# EAGLE board sensorNodev2 (EAGLE 7.2.0)
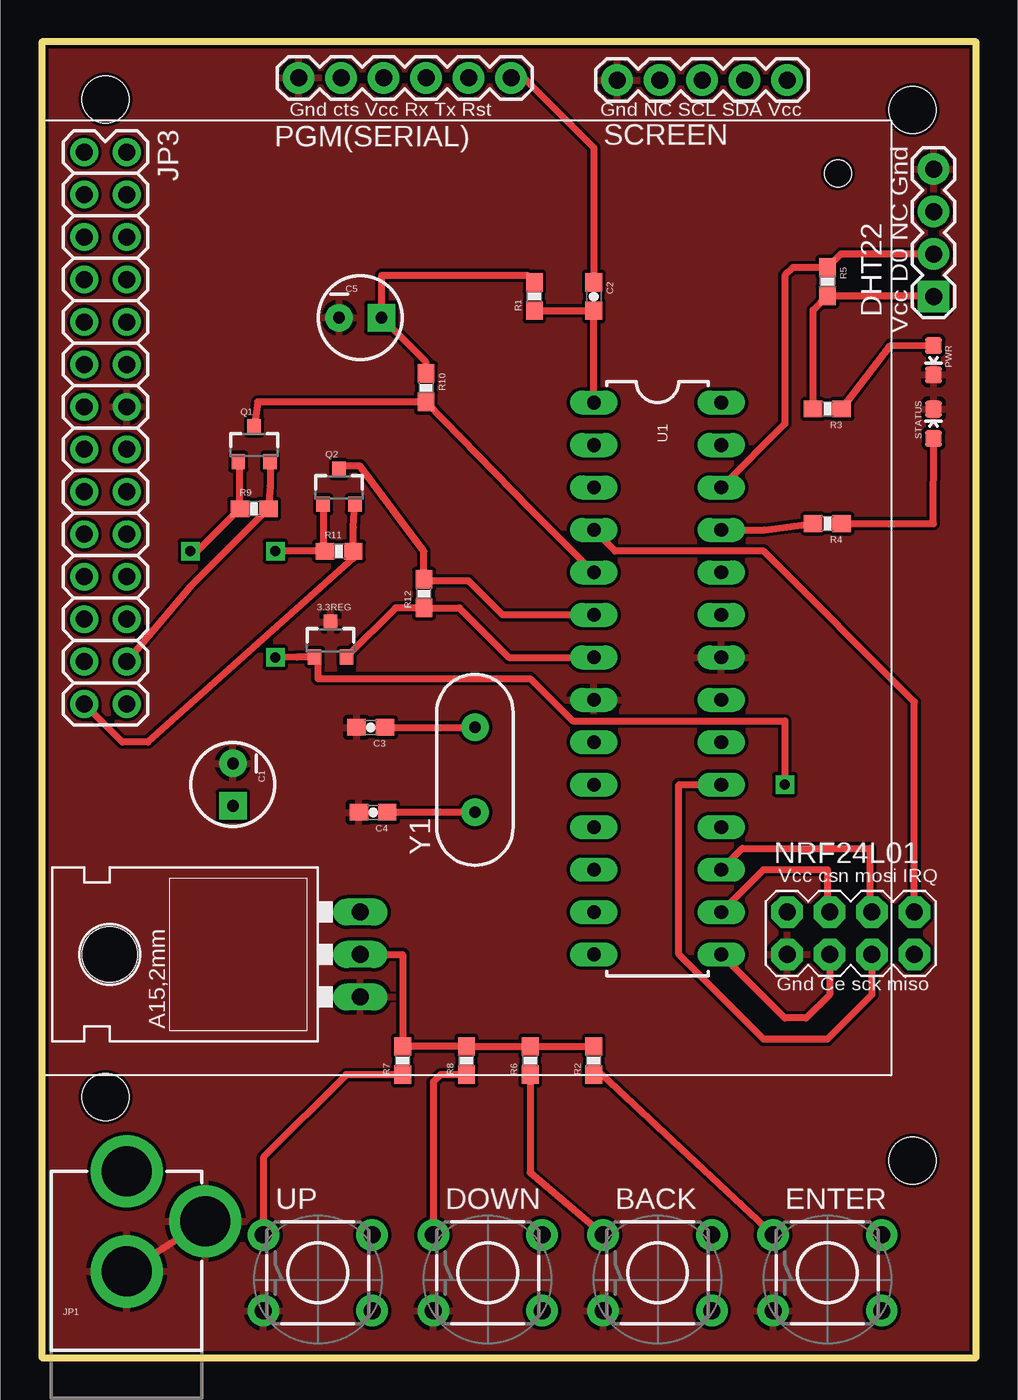
[diagram p0: board, top side]
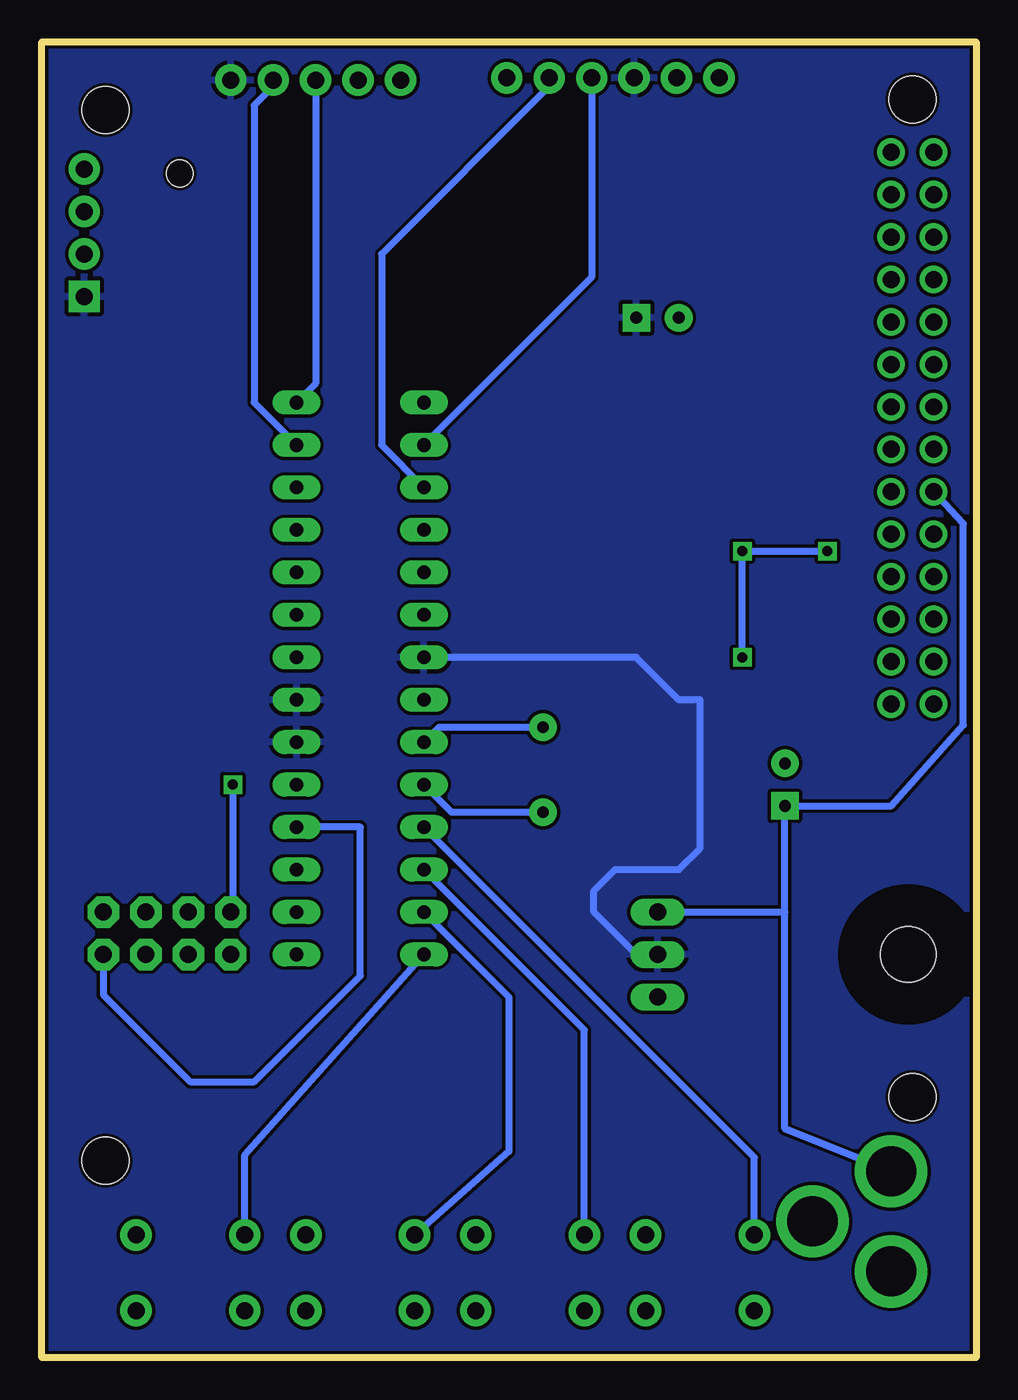
[diagram p1: board, bottom side, seen from below]

Size 55.88 x 78.74 mm. Coordinates in mm from the lower left corner, seen from the top.
Outline: 0,78.74 0,0 55.88,0 55.88,78.74 0,78.74
Copper layers (1*16): Top 0.035mm / dielectric 1.5mm / Bottom 0.035mm
Design rules "SparkFun": minimum track width 8mil, minimum drill 20mil, track to track 8mil, track to pad 8mil, pad to pad 8mil, via to via 8mil, smd to smd 8mil, copper to edge 8mil, drill to drill 8mil, minimum pad ring 12mil, minimum via ring 10mil, stop-mask expansion 4mil, vias tented up to drill 20mil, thermal gap 10mil

## Footprints (pad centres in the part's own frame; a part is rotated, then mirrored left to right if it is on the bottom)
SOT23-3 = smd 0.8 x 0.9: 1 -0.95,-1; 2 0.95,-1; 3 0,1.1
TACTILE-PTH = drill 1.016 pad 1.88: 1 -3.251,2.261; 2 3.251,2.261; 3 -3.251,-2.261; 4 3.251,-2.261
CPOL-RADIAL-10UF-25V = drill 0.7 pad 1.651 square: 1 1.27,0 | drill 0.7 pad 1.651: 2 -1.27,0
0603-CAP = smd 1.1 x 1: 1 -0.85,0; 2 0.85,0
1X04 = drill 1.016 pad 1.88 square: 1 0,0 | drill 1.016 pad 1.88: 2 2.54,0; 3 5.08,0; 4 7.62,0
78XXL = drill 1.016 long: GND 0,-3.81; IN -2.54,-3.81; OUT 2.54,-3.81 | hole 3.302: 0,11.176
POWER_JACK_PTH = drill 2.997 pad 4.318: GND 0,7.7; GNDBREAK 4.7,10.7; PWR 0,13.7
K-30 = drill 1.016 pad 1.651: 1 1.905,2.54; 2 1.905,5.08; 3 4.445,2.54; 4 4.445,5.08; 5 6.985,2.54; 6 6.985,5.08; 7 9.525,2.54; 8 9.525,5.08; 9 12.065,2.54; 10 12.065,5.08; 11 14.605,2.54; 12 14.605,5.08; 13 17.145,2.54; 14 17.145,5.08; 15 19.685,2.54; 16 19.685,5.08; 17 22.225,2.54; 18 22.225,5.08; 19 24.765,2.54; 20 24.765,5.08; 21 27.305,2.54; 22 27.305,5.08; 23 29.845,2.54; 24 29.845,5.08; 25 32.385,2.54; 26 32.385,5.08; 27 34.925,2.54; 28 34.925,5.08 | hole 1.587: 3.175,47.625
2X4 = drill 1.016 pad 1.88 octagon: 1 -3.81,-1.27; 2 -3.81,1.27; 3 -1.27,-1.27; 4 -1.27,1.27; 5 1.27,-1.27; 6 1.27,1.27; 7 3.81,-1.27; 8 3.81,1.27
1X06 = drill 1.016 pad 1.88: 1 0,0; 2 2.54,0; 3 5.08,0; 4 7.62,0; 5 10.16,0; 6 12.7,0
LED-0603 = smd 1 x 1: A 0,-0.877; C 0,0.877
0603-RES = smd 1.1 x 1: 1 -0.85,0; 2 0.85,0
1X05 = drill 1.016 pad 1.88: 1 0,0; 2 2.54,0; 3 5.08,0; 4 7.62,0; 5 10.16,0
DIL28-3 = drill 0.813 long: 1 -16.51,-3.81; 2 -13.97,-3.81; 3 -11.43,-3.81; 4 -8.89,-3.81; 5 -6.35,-3.81; 6 -3.81,-3.81; 7 -1.27,-3.81; 8 1.27,-3.81; 9 3.81,-3.81; 10 6.35,-3.81; 11 8.89,-3.81; 12 11.43,-3.81; 13 13.97,-3.81; 14 16.51,-3.81; 15 16.51,3.81; 16 13.97,3.81; 17 11.43,3.81; 18 8.89,3.81; 19 6.35,3.81; 20 3.81,3.81; 21 1.27,3.81; 22 -1.27,3.81; 23 -3.81,3.81; 24 -6.35,3.81; 25 -8.89,3.81; 26 -11.43,3.81; 27 -13.97,3.81; 28 -16.51,3.81
CONTAINER_BOTTOM = hole 2.8: 54.61,15.605; 54.61,78.47; 6.35,79.105; 6.35,19.415
HC49US = drill 0.7 pad 1.651: 1 -2.54,0; 2 2.54,0

## Placement (x,y rotation side)
3.3REG  LM3480IM4  [SOT23-3]  17.27,42.93 0 top
BACK  SWITCH-MOMENTARY-2PTH  [TACTILE-PTH]  36.83,5.08 0 top
C1  10uF  [CPOL-RADIAL-10UF-25V]  11.43,34.29 270 top
C2  0.1uF  [0603-CAP]  33.02,63.5 270 top
C3  22pF  [0603-CAP]  19.68,37.72 180 top
C4  22pF  [0603-CAP]  19.81,32.64 180 top
C5  10uF  [CPOL-RADIAL-10UF-25V]  19.05,62.23 0 top
DHT22  [1X04]  53.34,63.5 90 top
DOWN  SWITCH-MOMENTARY-2PTH  [TACTILE-PTH]  26.67,5.08 0 top
ENTER  SWITCH-MOMENTARY-2PTH  [TACTILE-PTH]  46.99,5.08 0 top
IC1  V_REG_LD1117VXX  [78XXL]  15.24,24.13 90 top
JP1  POWER_JACKPTH  [POWER_JACK_PTH]  5.08,-2.54 0 top
JP3  K-30K-30  [K-30]  0,74.04 270 top
NRF24L01  M04X2  [2X4]  48.39,25.4 0 top
PGM(SERIAL)  [1X06]  28.07,76.58 180 top
PWR  [LED-0603]  53.34,59.69 180 top
Q1  BSS138  [SOT23-3]  12.7,54.61 0 top
Q2  BSS138  [SOT23-3]  17.78,52.07 0 top
R1  1K  [0603-RES]  29.46,63.5 90 top
R2  1K  [0603-RES]  33.02,17.78 90 top
R3  220  [0603-RES]  46.99,56.77 180 top
R4  220  [0603-RES]  46.99,49.91 180 top
R5  4.7K  [0603-RES]  46.99,64.39 270 top
R6  1K  [0603-RES]  29.21,17.78 90 top
R7  1K  [0603-RES]  21.59,17.78 90 top
R8  1K  [0603-RES]  25.4,17.78 90 top
R9  10K  [0603-RES]  12.7,50.8 0 top
R10  10K  [0603-RES]  22.99,58.04 270 top
R11  10K  [0603-RES]  17.78,48.26 0 top
R12  10K  [0603-RES]  22.86,45.72 90 top
SCREEN  [1X05]  34.42,76.45 0 top
STATUS  [LED-0603]  53.34,55.88 0 top
U1  ATMEGA328P_PDIP  [DIL28-3]  36.83,40.64 270 top
U$1  [CONTAINER_BOTTOM]  -2.54,-3.81 0 top
U$2  [CONTAINER_TOP]  -2.54,-3.81 0 top  (outside the outline)
UP  SWITCH-MOMENTARY-2PTH  [TACTILE-PTH]  16.51,5.08 0 top
Y1  [HC49US]  25.91,35.18 90 top

## Library data of the parts
3.3REG IC1 = SparkFun-PowerIC
BACK DOWN ENTER UP = SparkFun-Electromechanical
C1 C5 = SparkFun-Capacitors
C2 = SparkFun-Capacitors; PROD_ID: CAP-00810
C3 C4 = SparkFun-Capacitors; PROD_ID: CAP-07876
DHT22 NRF24L01 PGM(SERIAL) SCREEN = SparkFun-Connectors
JP1 = SparkFun-Connectors; PROD_ID: CONN-08197
JP3 = misc
PWR STATUS = SparkFun-LED
Q1 Q2 R9-R12 = SparkFun
R1-R4 R6-R8 = SparkFun-Resistors; PROD_ID: RES-07856
R5 = SparkFun-Resistors; PROD_ID: RES-07856; VALUE: 1K
U1 = SparkFun-DigitalIC
U$1 U$2 = bespin
Y1 = SparkFun-FreqCtrl

## Nets
3V: 3.3REG.1 NRF24L01.2 Q1.1 Q2.1 R9.1 R11.1
5V: C1.1 IC1.OUT JP1.PWR JP3.17
BACK: BACK.1 R6.1 U1.13
CE: NRF24L01.3 U1.15
CSN: NRF24L01.4 U1.16
DOWN: DOWN.1 R8.1 U1.12
DTHP: DHT22.2 R5.1 U1.26
DTR: C2.1 PGM(SERIAL).1
ENTER: ENTER.1 R2.1 U1.14
GND: 3.3REG.3 BACK.3 C1.2 C3.2 C4.2 C5.2 DHT22.4 DOWN.3 ENTER.3 IC1.IN JP1.GND JP1.GNDBREAK JP3.14 NRF24L01.1 PGM(SERIAL).6 PWR.C SCREEN.1 STATUS.C U1.8 U1.22 UP.3
IRQ: NRF24L01.8 U1.4
LED1: R4.2 U1.25
MISO: NRF24L01.7 U1.18
MOSI: NRF24L01.6 U1.17
N$1: C3.1 U1.9 Y1.2
N$2: C4.1 U1.10 Y1.1
N$4: PWR.A R3.1
N$5: R4.1 STATUS.A
RESET: C2.2 R1.1 U1.1
RX: PGM(SERIAL).3 U1.2
RX_K30_H: Q1.3 R10.2 U1.5
RX_K30_L: JP3.26 Q1.2 R9.2
SCK: NRF24L01.5 U1.19
SCL: SCREEN.3 U1.28
SDA: SCREEN.4 U1.27
TX: PGM(SERIAL).2 U1.3
TX_K30_H: Q2.3 R12.2 U1.6
TX_K30_L: JP3.27 Q2.2 R11.2
UP: R7.1 U1.11 UP.1
VCC: 3.3REG.2 C5.1 DHT22.1 IC1.GND PGM(SERIAL).4 R1.2 R2.2 R3.2 R5.2 R6.2 R7.2 R8.2 R10.1 R12.1 SCREEN.5 U1.7 U1.20 U1.21

## Tracks (layer width: path | path; a pad name or v marks a point on that pad's centre or on a via)
3V  (via drill 0.6)
  Top 0.406: Q1.1 11.85,53.51 R9.1 9.31,48.26 v8.89,48.26 | v13.97,41.91 15.26,41.93 3.3REG.1 16.49,41.93 16.51,40.64 29.21,40.64 31.75,38.1 44.45,38.1 v44.45,34.29 | v13.97,48.26 R11.1 16.83,48.36 Q2.1
  Bottom 0.406: v13.97,41.91 v13.97,48.26 v8.89,48.26 | v44.45,34.29 44.45,26.8 NRF24L01.2
5V
  Bottom 0.406: JP1.PWR 11.43,13.7 11.43,26.67 | 11.43,26.67 C1.1 5.08,33.02 0.76,37.85 0.76,49.91 JP3.17 | IC1.OUT 11.43,26.67
BACK
  Top 0.406: R6.1 29.21,11.07 BACK.1
  Bottom 0.406: U1.13 27.94,21.59 27.94,12.34 BACK.1
CE
  Top 0.406: NRF24L01.3 47.12,21.72 45.72,20.32 44.45,20.32 U1.15
CSN
  Top 0.406: U1.16 43.18,29.21 46.99,29.21 46.99,26.8 NRF24L01.4
DOWN
  Top 0.406: R8.1 23.84,16.93 23.42,16.51 DOWN.1
  Bottom 0.406: DOWN.1 23.42,19.61 U1.12
DTHP
  Top 0.406: DHT22.2 47.79,66.04 R5.1 44.92,65.24 44.45,64.77 44.45,55.88 U1.26
DTR
  Top 0.406: PGM(SERIAL).1 28.83,76.58 33.02,72.39 C2.1
ENTER
  Top 0.406: R2.1 33.51,16.93 ENTER.1
  Bottom 0.406: ENTER.1 43.74,12.14 U1.14
GND
  Top 0.406: JP1.GND JP1.GNDBREAK
  pour Top: 0,78.74 0,0 55.88,0 55.88,78.74
IRQ
  Top 0.406: NRF24L01.8 52.2,39.24 43.18,48.26 34.29,48.26 U1.4
LED1
  Top 0.406: U1.25 43.22,49.53 R4.2
MISO
  Bottom 0.406: NRF24L01.7 52.2,21.72 46.99,16.51 43.18,16.51 36.83,22.86 36.83,31.75 U1.18
MOSI
  Top 0.406: U1.17 41.91,30.48 49.53,30.48 49.53,26.8 NRF24L01.6
N$1
  Top 0.406: C3.1 Y1.2
  Bottom 0.406: Y1.2 32.13,37.72 U1.9
N$2
  Top 0.406: Y1.1 C4.1
  Bottom 0.406: Y1.1 31.37,32.64 U1.10
N$4
  Top 0.406: R3.1 50.79,60.58 PWR.A
N$5
  Top 0.406: R4.1 53.33,49.91 STATUS.A
RESET
  Top 0.406: U1.1 C2.2 R1.1
RX
  Bottom 0.406: PGM(SERIAL).3 22.99,64.64 U1.2
RX_K30_H
  Top 0.406: U1.5 29.17,50.84 R10.2 12.91,57.19 Q1.3
RX_K30_L
  Top 0.406: Q1.2 13.65,52.17 R9.2 8.89,46.14 JP3.26
SCK
  Top 0.406: NRF24L01.5 49.66,21.72 46.99,19.05 43.18,19.05 38.1,24.13 38.1,34.29 U1.19
SCL
  Bottom 0.406: SCREEN.3 39.5,58.29 U1.28
SDA
  Bottom 0.406: SCREEN.4 42.04,76.07 43.18,74.93 43.18,57.15 U1.27
TX
  Bottom 0.406: PGM(SERIAL).2 25.53,76.07 35.56,66.04 35.56,54.61 U1.3
TX_K30_H
  Top 0.406: Q2.3 17.61,53.34 19.05,53.34 22.86,48.26 R12.2 22.95,46.48 25.53,46.48 27.56,44.45 U1.6
TX_K30_L
  Top 0.406: JP3.27 4.83,36.83 6.35,36.83 18.63,47.84 R11.2 18.63,49.7 Q2.2
UP
  Top 0.406: R7.1 18.2,16.93 13.26,11.99 UP.1
  Bottom 0.406: UP.1 13.26,11.99 U1.11
VCC
  Top 0.406: DHT22.1 53.3,63.54 R5.2 46.14,62.69 R3.2 | IC1.GND 21.59,24.13 R7.2 R8.2 R6.2 R2.2 | 3.3REG.2 21.17,44.87 R12.1 24.98,44.87 27.94,41.91 U1.7 | R10.1 22.99,59.56 C5.1 20.32,64.77 29.04,64.77 R1.2
  Bottom 0.406: IC1.GND 20.32,24.13 22.86,26.67 22.86,27.94 21.59,29.21 17.78,29.21 16.51,30.48 16.51,39.37 17.78,39.37 20.32,41.91 U1.7
  pour Bottom: 0,78.74 55.88,78.74 55.88,0 0,0

## Text on the board
tNames: Gnd NC SCL SDA Vcc | Gnd cts Vcc Rx Tx Rst | Vcc D0 NC Gnd | Vcc csn mosi IRQ | Gnd Ce sck miso